# Altium PCB PCB1.PcbDoc
Units mil, origin at the board's own origin, x right, y up, seen from the top; angles counter-clockwise.
Board outline 6000 x 4000 mil, 2 copper layers (Top Layer, Bottom Layer); 16 components, 55 nets, 202 pads, 0 vias.
Unrouted connection lines stored in the file: 80.
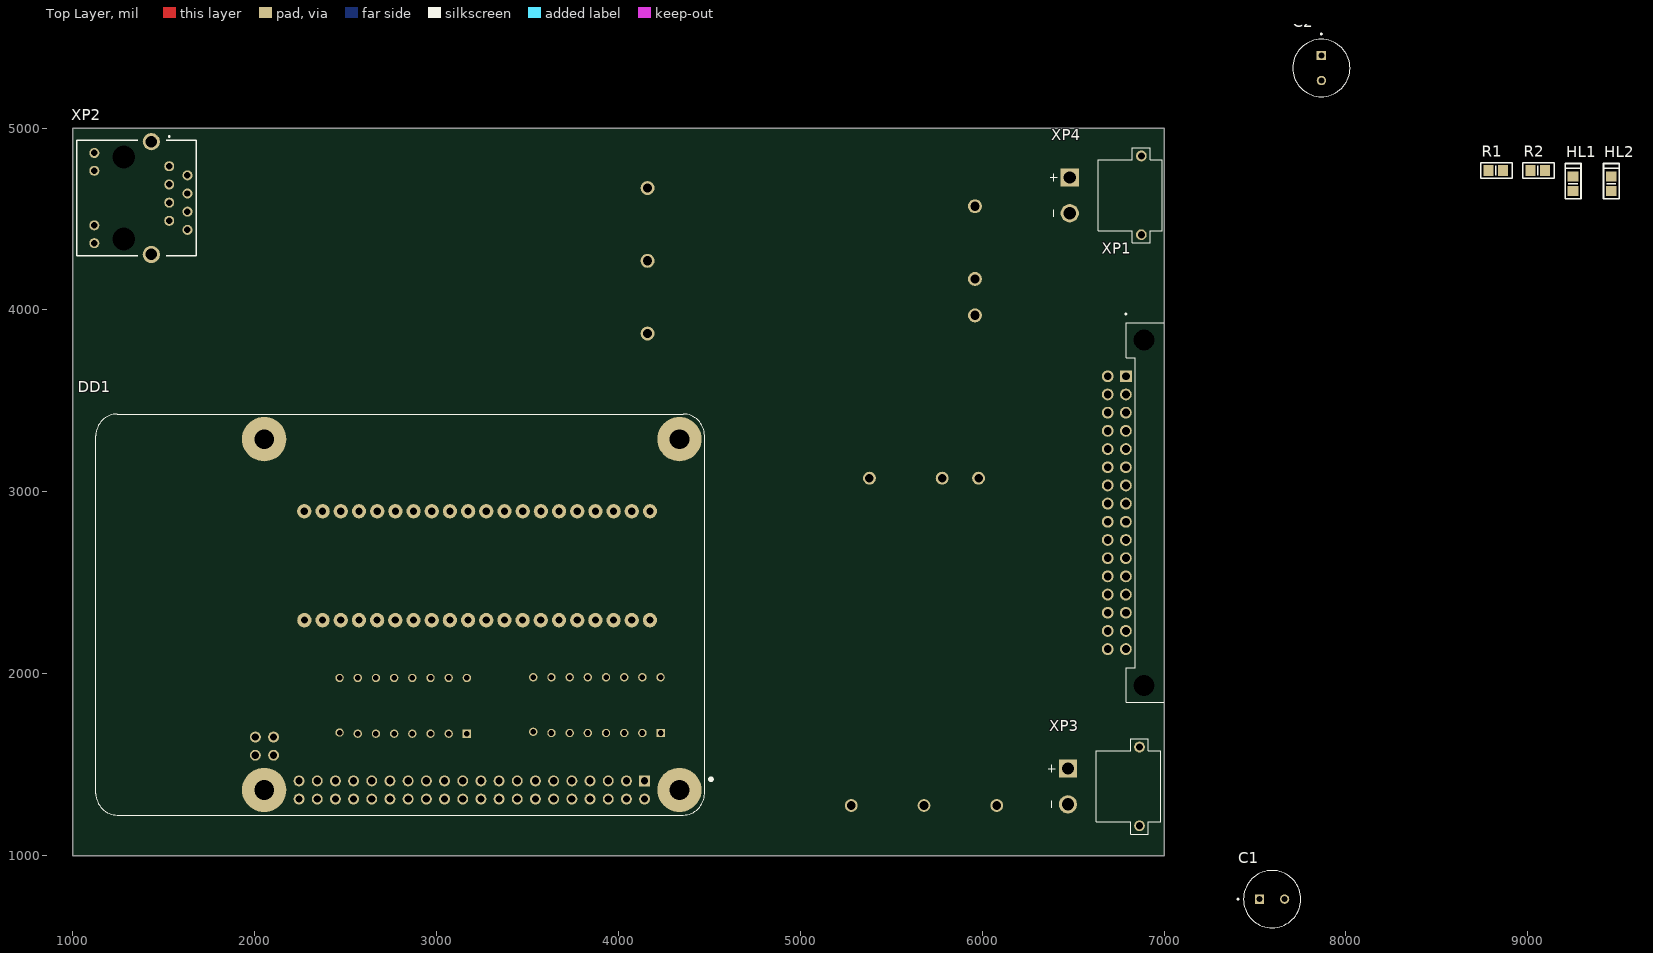
[diagram p0: Top Layer view]
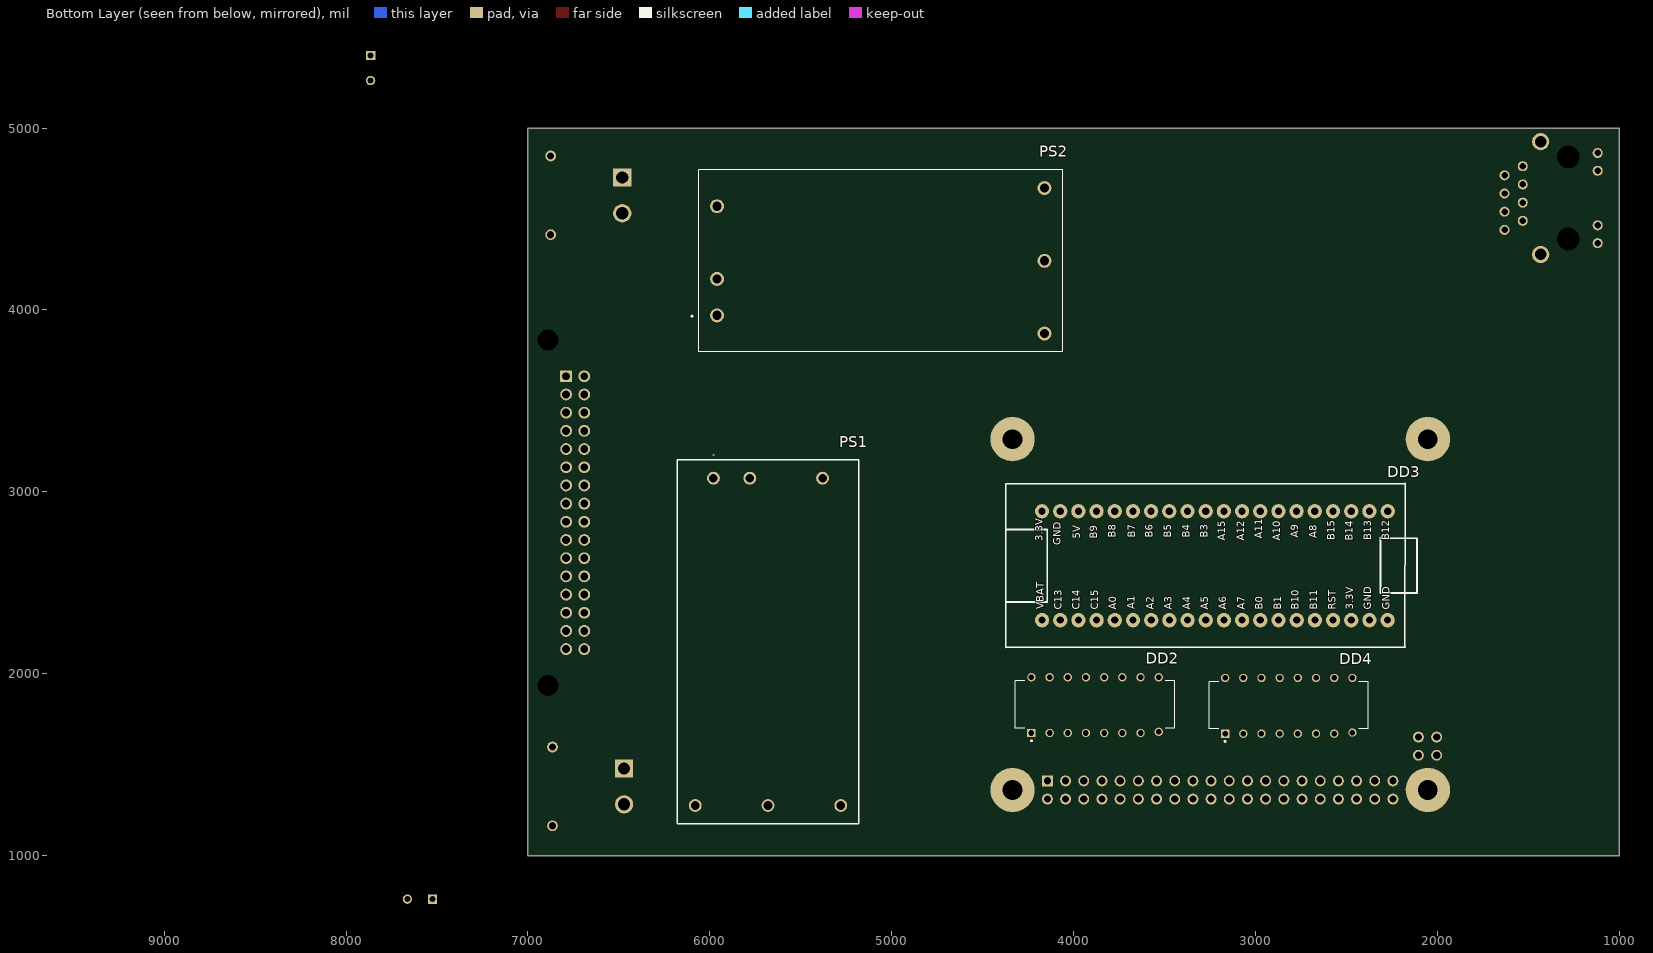
[diagram p1: Bottom Layer view, seen from below]

## Layer stack, top to bottom
Top Solder: solder mask 0.4, Solder Resist, Dk 3.5
Top Layer: signal copper 1.4
Dielectric 1: dielectric 12.6, FR-4, Dk 4.8
Bottom Layer: signal copper 1.4
Bottom Solder: solder mask 0.4, Solder Resist, Dk 3.5

## Board outline
1000,1000 7000,1000 7000,5000 1000,5000

## Design rules (kind name [scope] priority, off if disabled: settings)
Clearance [All] p1: gap=10 ignorepadtopadclearanceinfootprint=FALSE
DiffPairsRouting [All] p1: maxlimit=10 minlimit=10 mostfreqgap=10 toplayer_minwidth=15 toplayer_maxwidth=15 toplayer_prefwidth=15 bottomlayer_minwidth=15 bottomlayer_maxwidth=15 bottomlayer_prefwidth=15 maxuncoupledlength=500
PolygonConnect [All] p1: connectstyle=Relief reliefconductorwidth=10 reliefentries=4 polygonreliefangle="90 Angle" airgapwidth=10
RoutingVias [All] p1: holewidth=28 width=50 viastyle="Through Hole" minholewidth=28 minwidth=50 maxholewidth=28 maxwidth=50
SolderMaskExpansion [All] p1: expansion=4 istentingtop=FALSE
Width [All] p1: maxlimit=10 minlimit=10 preferedwidth=10
29 further rules are at their usual default settings.

## Classes and differential pairs
net class Power: 3.3V 5V 12V GND
component class Designator: C1 C2 HL1 HL2 PS1 PS2 R1 R2
net class SERVO[1..2]: SERVO1 SERVO2
net class PWM[1..10]: PWM1 PWM2 PWM3 PWM4 PWM5 PWM6 PWM7 PWM8 PWM9 PWM10
component class "VMA control": DD2 DD4
component class Main: DD1
component class Connectors: XP1 XP3 XP4
differential pair "ethernet 4": +"ethernet 4_P" -"ethernet 4_N"
differential pair "ethernet 3": +"ethernet 3_P" -"ethernet 3_N"
differential pair "ethernet 2": +"ethernet 2_P" -"ethernet 2_N"
differential pair "ethernet 1": +"ethernet 1_P" -"ethernet 1_N"

## Components (designator, comment, footprint, x,y, rotation, side; value= is the part's Value field where it differs from the comment)
C1 "Capacitor_polar" RADIAL-2_8mm 7593.9,760 r0 top value="1000 мк"
C2 "Capacitor_polar" RADIAL-2_8mm 7865,5330 r270 top value="220 мк"
DD1 "RPI" RPI 2800,2325 r180 top
DD2 "CD4050B" DIP16_in_socket 3881.61,1830 r90 bottom
DD3 "STM32F103C8T6_board" STM32F103C8T6_board 3450,2585 r90 bottom
DD4 "CD4050B" DIP16_in_socket 2816.61,1826.3 r90 bottom
HL1 "Value" 0805D 9245,4690 r90 top
HL2 "Value" 0805D 9455,4690 r90 top
PS1 "SKM30A-05" SKM30A05 5980,3075 r270 bottom
PS2 "SKM30A-12" SKM30B12 5960,3970 r180 bottom
R1 "Resistor" 0805R 8820,4770 r0 top value=9.1кОм
R2 "Resistor" 0805R 9050,4770 r0 top value=2кОм
XP1 "DIN41612_32_2row_right_angle_father" DIN41612_32_2row_right_angle_father 6998.66,2885 r90 top
XP2 "1734577-3" 1-1734577-3-rj45-8p8c 1530,4790 r90 top
XP3 "XT30PW-M" XT30PW-M 6865,1380 r270 top
XP4 "XT30PW-M" XT30PW-M 6875,4630 r270 top

## Footprints (in the part's own frame and the unit in brackets; to place one, negate y for a bottom-side part, rotate by r counter-clockwise, add the part's x,y. Pads: shape width x height; smd on the part's side, far side on the other; paste and mask are expansions set on the pad)
1-1734577-3-rj45-8p8c [mm]
  round 1.4 hole 0.9: 1(0,0) 2(-1.27,-2.54) 3(-2.54,0) 4(-3.81,-2.54) 5(-5.08,0) 6(-6.35,-2.54) 7(-7.62,0) 8(-8.89,-2.54) 9(-10.745,10.46) 10(-8.255,10.46) 11(-0.635,10.46) 12(1.855,10.46)
  round 2.4 hole 1.6: MH1(3.43,2.5) MH2(-12.32,2.5)
  round 1.6 hole 3.2 unplated: MH3(1.27,6.35) MH4(-10.16,6.35)
  silkscreen extent -12.52,-3.8 4.25,12.9, body extent -12.52,-3.8 3.63,12.9, height 16.55
0805D [mm]
  rect 1.4x1.5 smd: 1(-0.9,-0.1) 2(1.1,-0.1)
  silkscreen extent -2,-1.2 2.93,1, body extent -0.97,-0.8 1.17,0.6, height 0.7
0805R [mm]
  rect 1.4x1.5 smd: 1(-0.9,-0.1) 2(1.1,-0.1)
  silkscreen extent -2,-1.2 2.4,1, body extent -0.9,-0.7 1.1,0.5, height 0.5
DIN41612_32_2row_right_angle_father [mm]
  rect 1.65x1.65 / inner round 1.65 / far side rect 1.65x1.65 hole 1.1: A1(19.05,5.3)
  round 1.65 hole 1.1: A2(16.51,5.3) A3(13.97,5.3) A4(11.43,5.3) A5(8.89,5.3) A6(6.35,5.3) A7(3.81,5.3) A8(1.27,5.3) A9(-1.27,5.3) A10(-3.81,5.3) A11(-6.35,5.3) A12(-8.89,5.3) A13(-11.43,5.3) A14(-13.97,5.3) A15(-16.51,5.3) A16(-19.05,5.3) B1(19.05,7.84) B2(16.51,7.84) B3(13.97,7.84) B4(11.43,7.84) B5(8.89,7.84) B6(6.35,7.84) B7(3.81,7.84) B8(1.27,7.84) B9(-1.27,7.84) B10(-3.81,7.84) B11(-6.35,7.84) B12(-8.89,7.84) B13(-11.43,7.84) B14(-13.97,7.84) B15(-16.51,7.84) B16(-19.05,7.84)
  round 0 hole 2.9 unplated: ""(-24.13,2.76) ""(24.13,2.76)
  silkscreen extent -26.5,0 27.85,5.4, body extent -26.52,-7.28 26.53,8.18, height 6.84
DIP16_in_socket [mm]
  rect 1.17x1.17 hole 0.77: 1(-3.97,8.89)
  round 1.17 hole 0.77: 2(-3.97,6.35) 3(-3.97,3.81) 4(-3.97,1.27) 5(-3.97,-1.27) 6(-3.97,-3.81) 7(-3.97,-6.35) 8(-3.81,-8.89) 9(3.81,-8.89) 10(3.81,-6.35) 11(3.81,-3.81) 12(3.81,-1.27) 13(3.81,1.27) 14(3.81,3.81) 15(3.81,6.35) 16(3.81,8.89)
  silkscreen extent -5.15,-11.11 3.3,11.11, body extent -5.24,-10.46 4.96,10.46, height 7.88
RADIAL-2_8mm [mm]
  rect 1.3x1.3 hole 0.85: 1(-1.75,0)
  round 1.3 hole 0.85: 2(1.75,0)
  silkscreen extent -4.85,-4 4,4, body extent -4,-4 4,4, height 11.5
RPI [mil]
  rect 60x60 / inner round 60 / far side rect 60x60 hole 40: 1(-1343.7,914.57)
  round 60 hole 40: 2(-1343.7,1014.57) 3(-1243.7,914.57) 4(-1243.7,1014.57) 5(-1143.7,914.57) 6(-1143.7,1014.57) 7(-1043.7,914.57) 8(-1043.7,1014.57) 9(-943.7,914.57) 10(-943.7,1014.57) 11(-843.7,914.57) 12(-843.7,1014.57) 13(-743.7,914.57) 14(-743.7,1014.57) 15(-643.7,914.57) 16(-643.7,1014.57) 17(-543.7,914.57) 18(-543.7,1014.57) 19(-443.7,914.57) 20(-443.7,1014.57) 21(-343.7,914.57) 22(-343.7,1014.57) 23(-243.7,914.57) 24(-243.7,1014.57) 25(-143.7,914.57) 26(-143.7,1014.57) 27(-43.7,914.57) 28(-43.7,1014.57) 29(56.3,914.57) 30(56.3,1014.57) 31(156.3,914.57) 32(156.3,1014.57) 33(256.3,914.57) 34(256.3,1014.57) 35(356.3,914.57) 36(356.3,1014.57) 37(456.3,914.57) 38(456.3,1014.57) 39(556.3,914.57) 40(556.3,1014.57) 41(796.46,673.5) 42(796.46,773.5) 43(696.46,673.5) 44(696.46,773.5)
  round 244.09 hole 108.27: S1(-1535.43,964.57) S2(748.03,964.57) S3(748.03,-964.57) S4(-1535.43,-964.57)
  silkscreen extent -1717,-1102 1673,1102
SKM30A05 [mm]
  round 1.8 hole 1.2: 1(0,0) 2(0,5.08) 3(0,15.24) 4(45.72,-2.54) 5(45.72,7.62) 6(45.72,17.78)
  silkscreen extent -3.3,-5.08 48.26,20.32, body extent -2.54,-5.08 48.26,20.32, height 11.3
SKM30B12 [mm]
  round 1.95 hole 1.3: 1(0,0) 2(0,5.08) 3(0,15.24) 4(45.72,-2.54) 5(45.72,7.62) 6(45.72,17.78)
  silkscreen extent -3.6,-5.08 48.26,20.32, body extent -2.54,-5.08 48.26,20.32, height 11.3
STM32F103C8T6_board [mm]
  round 2 hole 1: 1(7.828,-29.909) 2(7.828,-27.343) 3(7.828,-24.803) 4(7.828,-22.263) 5(7.828,-19.723) 6(7.828,-17.183) 7(7.828,-14.643) 8(7.828,-12.103) 9(7.828,-9.563) 10(7.828,-7.023) 11(7.828,-4.483) 12(7.828,-1.943) 13(7.828,0.597) 14(7.828,3.137) 15(7.828,5.677) 16(7.828,8.217) 17(7.828,10.757) 18(7.828,13.297) 19(7.828,15.837) 20(7.828,18.377) 21(-7.386,18.366) 22(-7.386,15.826) 23(-7.386,13.286) 24(-7.386,10.746) 25(-7.386,8.206) 26(-7.386,5.666) 27(-7.386,3.126) 28(-7.386,0.586) 29(-7.386,-1.954) 30(-7.386,-4.494) 31(-7.386,-7.034) 32(-7.386,-9.574) 33(-7.386,-12.114) 34(-7.386,-14.654) 35(-7.386,-17.194) 36(-7.386,-19.734) 37(-7.386,-22.274) 38(-7.386,-24.814) 39(-7.386,-27.354) 40(-7.386,-29.894)
  silkscreen extent -11.22,-34 11.69,23.43, body extent -11.18,-33.27 11.68,24.29, height 12.31
XT30PW-M [mm]
  round 1.508 hole 1: 0(-5.5,0) 0(5.5,0)
  round 2.55 hole 1.7: N(2.5,-10)
  rect 2.55x2.55 / inner round 2.55 / far side rect 2.55x2.55 hole 1.7: P(-2.5,-10)
  silkscreen extent -6.65,-12.75 6.65,2.95, body extent -6.65,-11 6.65,2.95, height 5

## Part data
C1 C2: library part "4,7 мк", "Полярный конденсатор", Part Number=Capacitor_polar
DD2 DD4: "Шесть буферных элементов", Part Number=CD4050B
DD3: "blue pill", Part Number=STM32F103C8T6_board
HL1: library part LED, Case=-, Color=зеленый, Datasheet=-, Manufacturer=-, Notice=-, Rate=-, Shop=-
HL2: library part LED, Case=-, Color=красный, Datasheet=-, Manufacturer=-, Notice=-, Rate=-, Shop=-
PS1: "Power Supply", Manufacturer_Name="Mean Well", Mouser Part Number=709-SKM30A-05, Datasheet Link=https://www.meanwell.com/webapp/product/search.aspx?prod=SKM30, Height=11.2mm, Manufacturer_Part_Number=SKM30A-05, Mouser Price/Stock=https://www.mouser.co.uk/ProductDetail/MEAN-WELL/SKM30A-05?qs=WtedIhRlNpsvgfTGPi4UAw%3D%3D
PS2: "Power Supply", Manufacturer_Name="Mean Well", Mouser Part Number=709-SKM30A-12, Arrow Part Number=SKM30A-12, Arrow Price/Stock=https://www.arrow.com/en/products/skm30a-12/mean-well-enterprises, Datasheet Link=https://www.meanwell.com/webapp/product/search.aspx?prod=SKM30, Height=11.2mm, Manufacturer_Part_Number=SKM30A-12, Mouser Price/Stock=https://www.mouser.co.uk/ProductDetail/MEAN-WELL/SKM30A-12?qs=WtedIhRlNpuG9wDURm5lSA%3D%3D
XP1: "DIN41612R (DS1118-32M0R23), Разъем (вилка) тип B 32pin (2х16), шаг 2.54мм двухрядный угловой (ряд АВ)", Part Number=DIN41612_32_2row_right_angle_father
XP2: library part 1-1734577-3-rj45-8p8c, "Модульный разъем, Cat3, RJ45, Гнездо, 8 контакт(-ов), 8 вывод(-ов), 1 порт(-ов)", Part Number=1-1734577-3-rj45-8p8c
XP3 XP4: "30 А (15 продолжительно), 2 контакта разъем угловой отец", Value1="эта плюс", Value2="это пинус", Value3=Корпус, Part Number=XT30PW-M
DD1: Part Number=RPI

## Nets (pads, with @x,y where several pads share a name; then routed paths per layer and width w, separated by ;. In a path a pad name is that pad's centre, name@x,y a point inside that pad or via, vN(x,y) a via of type N, cw(c..) or ccw(c..) an arc to the next point about the centre after c; other vN are vias at no path point)
3.3V: DD3.20 DD3.38
5V: C1.1 DD1.2 DD1.4 DD2.1 DD4.1 HL2.1 PS1.6
12V: C2.1 HL1.1 PS2.6
"ethernet 1_N": XP1.A2 XP2.2
"ethernet 1_P": XP1.A1 XP2.1
"ethernet 2_N": XP1.A6 XP2.6
"ethernet 2_P": XP1.A3 XP2.3
"ethernet 3_N": XP1.A5 XP2.5
"ethernet 3_P": XP1.A4 XP2.4
"ethernet 4_N": XP1.A8 XP2.8
"ethernet 4_P": XP1.A7 XP2.7
GND: C1.2 C2.2 DD1.6 DD1.9 DD1.14 DD1.20 DD1.25 DD1.30 DD1.34 DD1.39 DD2.8 DD3.19 DD3.39 DD3.40 DD4.8 PS1.1 PS1.2 PS1.5 PS2.1 PS2.2 PS2.5 R1.1 R2.1 XP3.N XP4.N
I2C1_SCL: DD1.5 XP1.B1
I2C1_SDA: DD1.3 XP1.B2
I2C2_SCL: DD3.16 XP1.A13
I2C2_SDA: DD3.17 XP1.A15
NetHL1_2: HL1.2 R1.2
NetHL2_2: HL2.2 R2.2
PWM1: DD2.2 XP1.B5
PWM2: DD2.4 XP1.B6
PWM3: DD2.6 XP1.B7
PWM4: DD2.10 XP1.B8
PWM5: DD2.12 XP1.B9
PWM6: DD2.15 XP1.B10
PWM7: DD4.2 XP1.B11
PWM8: DD4.4 XP1.B12
PWM9: DD4.6 XP1.B13
PWM10: DD4.10 XP1.B14
SERVO1: DD4.12 XP1.B15
SERVO2: DD4.15 XP1.B16
STM_RX: DD1.32 DD3.15
STM_TX: DD1.33 DD3.14
TIM1_CH1: DD2.3 DD3.5
TIM1_CH2: DD2.5 DD3.6
TIM1_CH3: DD2.7 DD3.7
TIM1_CH4: DD2.9 DD3.8
TIM2_CH1: DD2.11 DD3.25
TIM2_CH2: DD2.14 DD3.26
TIM2_CH3: DD3.27 DD4.3
TIM2_CH4: DD3.28 DD4.5
TIM3_CH1: DD3.31 DD4.7
TIM3_CH2: DD3.32 DD4.9
TIM3_CH3: DD3.33 DD4.11
TIM3_CH4: DD3.34 DD4.14
UART0_RX: DD1.10 XP1.A9
UART0_TX: DD1.8 XP1.A10
UART2_RX: DD1.28 XP1.A11
UART2_TX: DD1.27 XP1.A12
UART3_RX: DD1.29 XP1.B3
UART3_TX: DD1.7 XP1.B4
UART4_RX: DD1.21
UART4_TX: DD1.24
V_BAT: XP3.P
V_IN: PS1.3 PS2.3
V_RES: XP4.P
pads on no net: DD1.1 DD1.11 DD1.12 DD1.13 DD1.15 DD1.16 DD1.17 DD1.18 DD1.19 DD1.22 DD1.23 DD1.26 DD1.31 DD1.35 DD1.36 DD1.37 DD1.38 DD1.40 DD1.41 DD1.42 DD1.43 DD1.44 DD1.S1 DD1.S2 DD1.S3 DD1.S4 DD2.13 DD2.16 DD3.1 DD3.2 DD3.3 DD3.4 DD3.9 DD3.10 DD3.11 DD3.12 DD3.13 DD3.18 DD3.21 DD3.22 DD3.23 DD3.24 DD3.29 DD3.30 DD3.35 DD3.36 DD3.37 DD4.13 DD4.16 PS1.4 PS2.4 XP1. XP1.A14 XP1.A16 XP2.9 XP2.10 XP2.11 XP2.12 XP2.MH1 XP2.MH2 XP2.MH3 XP2.MH4 XP3.0 XP4.0

## Text inside footprints (layer, text, board x,y; h text height)
DD3: Bottom Overlay "5V" at 3949.78,2742.2 h70 r270; Bottom Overlay "B9" at 3854.78,2742.2 h70 r270; Bottom Overlay "B8" at 3754.78,2747.2 h70 r270; Bottom Overlay "3.3V" at 4154.78,2727.2 h70 r270; Bottom Overlay "GND" at 4055.78,2705 h70 r270; Bottom Overlay "A5" at 3244.78,2352.2 h70 r270; Bottom Overlay "A2" at 3546,2352.2 h70 r270; Bottom Overlay "A3" at 3445.78,2352.2 h70 r270; Bottom Overlay "A4" at 3344,2352.2 h70 r270; Bottom Overlay "RST" at 2544.78,2352.2 h70 r270; Bottom Overlay "B10" at 2746.78,2352.2 h70 r270; Bottom Overlay "B11" at 2645,2352.2 h70 r270; Bottom Overlay "A6" at 3146.78,2352.2 h70 r270; Bottom Overlay "A7" at 3045,2352.2 h70 r270; Bottom Overlay "B0" at 2944.78,2352.2 h70 r270; Bottom Overlay "B1" at 2844,2352.2 h70 r270; Bottom Overlay "3.3V" at 2447.78,2352.2 h70 r270; Bottom Overlay "B15" at 2548.78,2732.6 h70 r270; Bottom Overlay "A8" at 2649.78,2744.7 h70 r270; Bottom Overlay "A11" at 2948,2741.4 h70 r270; Bottom Overlay "B3" at 3248.78,2747.2 h70 r270; Bottom Overlay "A9" at 2750.78,2745.9 h70 r270; Bottom Overlay "A15" at 3150.78,2730.1 h70 r270; Bottom Overlay "A12" at 3049,2730.1 h70 r270; Bottom Overlay "A10" at 2848.78,2730.1 h70 r270; Bottom Overlay "VBAT" at 4150,2355.06 h70 r270; Bottom Overlay "B5" at 3449.78,2747.2 h70 r270; Bottom Overlay "B14" at 2451,2731.4 h70 r270; Bottom Overlay "B7" at 3648,2747.2 h70 r270; Bottom Overlay "B4" at 3348,2745.9 h70 r270; Bottom Overlay "B6" at 3550.78,2748.4 h70 r270; Bottom Overlay "C15" at 3851.78,2352.2 h70 r270; Bottom Overlay "C13" at 4050.78,2352.2 h70 r270; Bottom Overlay "C14" at 3952.78,2352.2 h70 r270; Bottom Overlay "A0" at 3750.78,2352.2 h70 r270; Bottom Overlay "A1" at 3650,2355 h70 r270; Bottom Overlay "GND" at 2349.78,2352.2 h70 r270; Bottom Overlay "B13" at 2349.78,2732.2 h70 r270; Bottom Overlay "GND" at 2248.78,2352.2 h70 r270; Bottom Overlay "B12" at 2251,2732.6 h70 r270
XP1: Mechanical 13 "PCB EDGE" at 6988.43,3967.68 h39.37 r90